# EAGLE board platine-br110 (EAGLE 9.6.2)
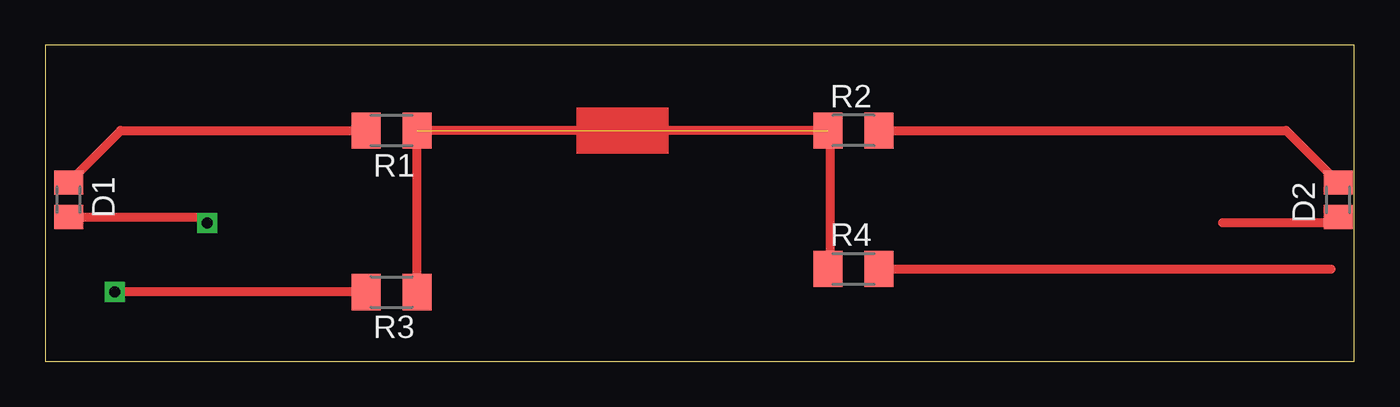
[diagram p0: board, top side]

Size 72 x 17.39 mm. Coordinates in mm from the lower left corner, seen from the top.
Outline: 0,0 72,0 72,17.39 0,17.39 0,0
Copper layers (1*16): Top 0.035mm / dielectric 1.5mm / Bottom 0.035mm
Design rules "default": minimum track width 6mil, minimum drill 0.35mm, track to track 6mil, track to pad 6mil, pad to pad 6mil, via to via 6mil, smd to smd 6mil, copper to edge 40mil, drill to drill 6mil, minimum pad ring 10mil, minimum via ring 8mil, stop-mask expansion 4mil, vias tented up to drill 0mil, thermal gap 10mil

## Footprints (pad centres in the part's own frame; a part is rotated, then mirrored left to right if it is on the bottom)
M0805 = smd 1.3 x 1.6: 1 -0.95,0; 2 0.95,0
M1206 = smd 1.6 x 2: 1 -1.4,0; 2 1.4,0
PASTILLE-1-PIN = drill 0.6 square: P$1 0,0

## Placement (x,y rotation side)
D1  [M0805]  1.27,8.89 270 top
D2  [M0805]  71.12,8.89 270 top
R1  1k  [M1206]  19.05,12.7 180 top
R2  1k  [M1206]  44.45,12.7 0 top
R3  1k  [M1206]  19.05,3.81 180 top
R4  1k  [M1206]  44.45,5.08 0 top
U$1  [PASTILLE-1-PIN]  3.81,3.81 0 top
U$2  [PASTILLE-1-PIN]  8.89,7.62 0 top
U$3  [PASTILLE-1-PIN]  8.89,7.62 0 top

## Library data of the parts
D1 D2 R1-R4 = rcl; SPICEPREFIX: R
U$1-U$3 = pcb-alain-train

## Nets
ALIMENTATION_NEGATIVE_LED_HAUTE_ARRIERE: D2.2
ALIMENTATION_NEGATIVE_LED_HAUTE_AVANT: D1.2
ALIMENTATION_POSITIVE: R1.1 R2.1 R3.1 R4.1
LED_BASSE_ARRIERE: R4.2
LED_BASSE_AVANT: R3.2 U$1.P$1
N$1: D1.1 R1.2
N$2: D2.1 R2.2

## Tracks (layer width: path | path; a pad name or v marks a point on that pad's centre or on a via)
ALIMENTATION_NEGATIVE_LED_HAUTE_ARRIERE
  Top 0.508: D2.2 71.12,7.62 64.77,7.62
ALIMENTATION_NEGATIVE_LED_HAUTE_AVANT
  Top 0.508: D1.2 9.21,7.94
ALIMENTATION_POSITIVE  (1 unrouted)
  Top 0.508: R3.1 R1.1 R2.1 43.18,12.7 43.18,5.21 R4.1
LED_BASSE_ARRIERE
  Top 0.508: R4.2 70.73,5.08
LED_BASSE_AVANT
  Top 0.508: R3.2 U$1.P$1
N$1
  Top 0.508: D1.1 4.13,12.7 R1.2
N$2
  Top 0.508: R2.2 68.26,12.7 D2.1
(copper drawn outside any net)
  shapes: Top area x1